# EAGLE board Sequencer - 8 Step - Cigar Box (EAGLE 6.6.0)

Size 51.3 x 32.8 mm. Coordinates in mm from the lower left corner, seen from the top.
Copper layers (1*16): Top 0.035mm / dielectric 1.5mm / Bottom 0.035mm
Design rules "default": minimum track width 10mil, minimum drill 24mil, track to track 8mil, track to pad 8mil, pad to pad 8mil, via to via 8mil, smd to smd 8mil, copper to edge 40mil, drill to drill 8mil, minimum pad ring 10mil, minimum via ring 8mil, stop-mask expansion 4mil, vias tented up to drill 0mil, thermal gap 10mil

## Footprints (pad centres in the part's own frame; a part is rotated, then mirrored left to right if it is on the bottom)
EURORACK-POWER = drill 0.8: P$1 -1.27,5.08; P$2 1.27,5.08; P$3 -1.27,2.54; P$4 1.27,2.54; P$5 -1.27,0; P$6 1.27,0; P$7 -1.27,-2.54; P$8 1.27,-2.54; P$9 -1.27,-5.08; P$10 1.27,-5.08

## Placement (x,y rotation side)
E$1  [KNOB_BOSS_MEDIUM]  20.3,-48.5 0 top  (outside the outline)
E$2  [KNOB_BOSS_MEDIUM]  237.3,-48.5 0 top  (outside the outline)
E$3  [KNOB_BOSS_MEDIUM]  51.3,-48.5 0 top  (outside the outline)
E$4  [KNOB_BOSS_MEDIUM]  82.3,-48.5 0 top  (outside the outline)
E$5  [KNOB_BOSS_MEDIUM]  113.3,-48.5 0 top  (outside the outline)
E$6  [KNOB_BOSS_MEDIUM]  144.3,-48.5 0 top  (outside the outline)
E$7  [KNOB_BOSS_MEDIUM]  175.3,-48.5 0 top  (outside the outline)
E$8  [KNOB_BOSS_MEDIUM]  206.3,-48.5 0 top  (outside the outline)
E$9  [3.5MM_JACK_TAYDA]  51.3,-22.5 270 top  (outside the outline)
E$10  [3.5MM_JACK_TAYDA]  82.3,-22.5 270 top  (outside the outline)
E$11  [3.5MM_JACK_TAYDA]  113.3,-22.5 270 top  (outside the outline)
E$12  [3.5MM_JACK_TAYDA]  144.3,-22.5 270 top  (outside the outline)
E$13  [3.5MM_JACK_TAYDA]  175.3,-22.5 270 top  (outside the outline)
E$14  [3.5MM_JACK_TAYDA]  206.3,-22.5 270 top  (outside the outline)
E$15  [3.5MM_JACK_TAYDA]  237.3,-22.5 270 top  (outside the outline)
E$16  [3.5MM_JACK_TAYDA]  20.3,17.5 90 top
E$17  [TOGGLE_SWITCH_TAYDA]  51.3,17.5 90 top
E$18  [LED_3MM]  59.3,-22.5 0 top  (outside the outline)
E$19  [LED_3MM]  90.3,-22.5 0 top  (outside the outline)
E$20  [LED_3MM]  121.3,-22.5 0 top  (outside the outline)
E$21  [LED_3MM]  152.3,-22.5 0 top  (outside the outline)
E$22  [LED_3MM]  183.3,-22.5 0 top  (outside the outline)
E$23  [LED_3MM]  214.3,-22.5 0 top  (outside the outline)
E$24  [LED_3MM]  245.3,-22.5 0 top  (outside the outline)
E$25  [POTENTIOMETER_TAYDA_6MM]  20.3,-48.5 0 top  (outside the outline)
E$26  [POTENTIOMETER_TAYDA_6MM]  51.3,-48.5 0 top  (outside the outline)
E$27  [POTENTIOMETER_TAYDA_6MM]  82.3,-48.5 0 top  (outside the outline)
E$28  [POTENTIOMETER_TAYDA_6MM]  113.3,-48.5 0 top  (outside the outline)
E$29  [POTENTIOMETER_TAYDA_6MM]  237.3,-48.5 0 top  (outside the outline)
E$30  [POTENTIOMETER_TAYDA_6MM]  206.3,-48.5 0 top  (outside the outline)
E$31  [POTENTIOMETER_TAYDA_6MM]  175.3,-48.5 0 top  (outside the outline)
E$32  [POTENTIOMETER_TAYDA_6MM]  144.3,-48.5 0 top  (outside the outline)
E$33  [SLIDE_SWITCH_2P3T_TAYDA]  48.3,-7 0 top  (outside the outline)
E$34  [ROTARY_SWITCH_TAYDA]  234.8,3.5 0 top  (outside the outline)
E$35  [3.5MM_JACK_TAYDA]  20.3,0 90 top
E$36  [3.5MM_JACK_TAYDA]  20.3,-22.5 270 top  (outside the outline)
E$37  [3.5MM_JACK_TAYDA]  92.3,-1.5 90 top  (outside the outline)
E$38  [EURORACK-POWER]  151.8,17.5 90 top  (outside the outline)
E$39  [3.5MM_JACK_TAYDA]  124.3,-4 270 top  (outside the outline)
E$40  [POTENTIOMETER_TAYDA_6MM]  153.3,-4 90 top  (outside the outline)
E$41  [TOGGLE_SWITCH_TAYDA]  179.3,-3.5 90 top  (outside the outline)
E$42  [KNBO_BOSS_SMALL]  153.3,-4 0 top  (outside the outline)
E$43  [LED_3MM]  59.3,-5 0 top  (outside the outline)
E$44  [LED_3MM]  59.3,0 0 top  (outside the outline)
E$45  [LED_3MM]  59.3,5 0 top  (outside the outline)
E$46  [3.5MM_JACK_TAYDA]  196.8,-4 270 top  (outside the outline)
E$47  [LED_3MM]  34.3,9.5 0 top
E$48  [3.5MM_JACK_TAYDA]  206.8,17.5 270 top  (outside the outline)
E$50  [3.5MM_JACK_TAYDA]  191.3,17.5 270 top  (outside the outline)
E$51  [3.5MM_JACK_TAYDA]  175.8,17.5 270 top  (outside the outline)
E$52  [3.5MM_JACK_TAYDA]  82.3,17.5 90 top  (outside the outline)
E$53  [3.5MM_JACK_TAYDA]  97.8,17.5 90 top  (outside the outline)
E$54  [3.5MM_JACK_TAYDA]  113.3,17.5 90 top  (outside the outline)
E$55  [LED_3MM]  28.3,-22.5 0 top  (outside the outline)
E$56  [LED_3MM]  12.3,0 0 top
E$57  [LED_3MM]  12.3,17.5 0 top
E$58  [LED_3MM]  84.3,-1.5 0 top  (outside the outline)
E$59  [LED_3MM]  132.3,-4 0 top  (outside the outline)
E$60  [LED_3MM]  74.3,17.5 0 top  (outside the outline)
E$61  [LED_3MM]  89.8,17.5 0 top  (outside the outline)
E$62  [LED_3MM]  105.3,17.5 0 top  (outside the outline)
E$63  [LED_3MM]  183.8,17.5 0 top  (outside the outline)
E$64  [LED_3MM]  199.3,17.5 0 top  (outside the outline)
E$65  [LED_3MM]  214.8,17.5 0 top  (outside the outline)
E$66  [LED_3MM]  204.8,-4 0 top  (outside the outline)

## Library data of the parts
E$1-E$37 E$39-E$48 E$50-E$66 = !synth_panel
E$38 = !synth_sch

## Text on the board
FrontPanel: EuroPower | FILTER-LVL
PanelText: FREQ | FREQ-RANGE | X1 | X2 | X3 | Q1 | Q2 | Q3 | INT-OSC | Binary Step Inputs | Binary Step Outputs | CLK | CLK-SRC | Reset | CLK | FLTR-RNG | CV-OUT | 1 | 2 | 3 | 4 | 5 | 6 | 7 | 8
Artwork: Internal | External | INT+EXT | INPUTS | OUTPUTS